# Altium PCB PCB3.PcbDoc
Units mm, origin at the board's own origin, x right, y up, seen from the top; angles counter-clockwise.
Board outline 90 x 120 mm, 2 copper layers (Top Layer, Bottom Layer); 37 components, 42 nets, 192 pads, 30 vias.
Unrouted connection lines stored in the file: 61.
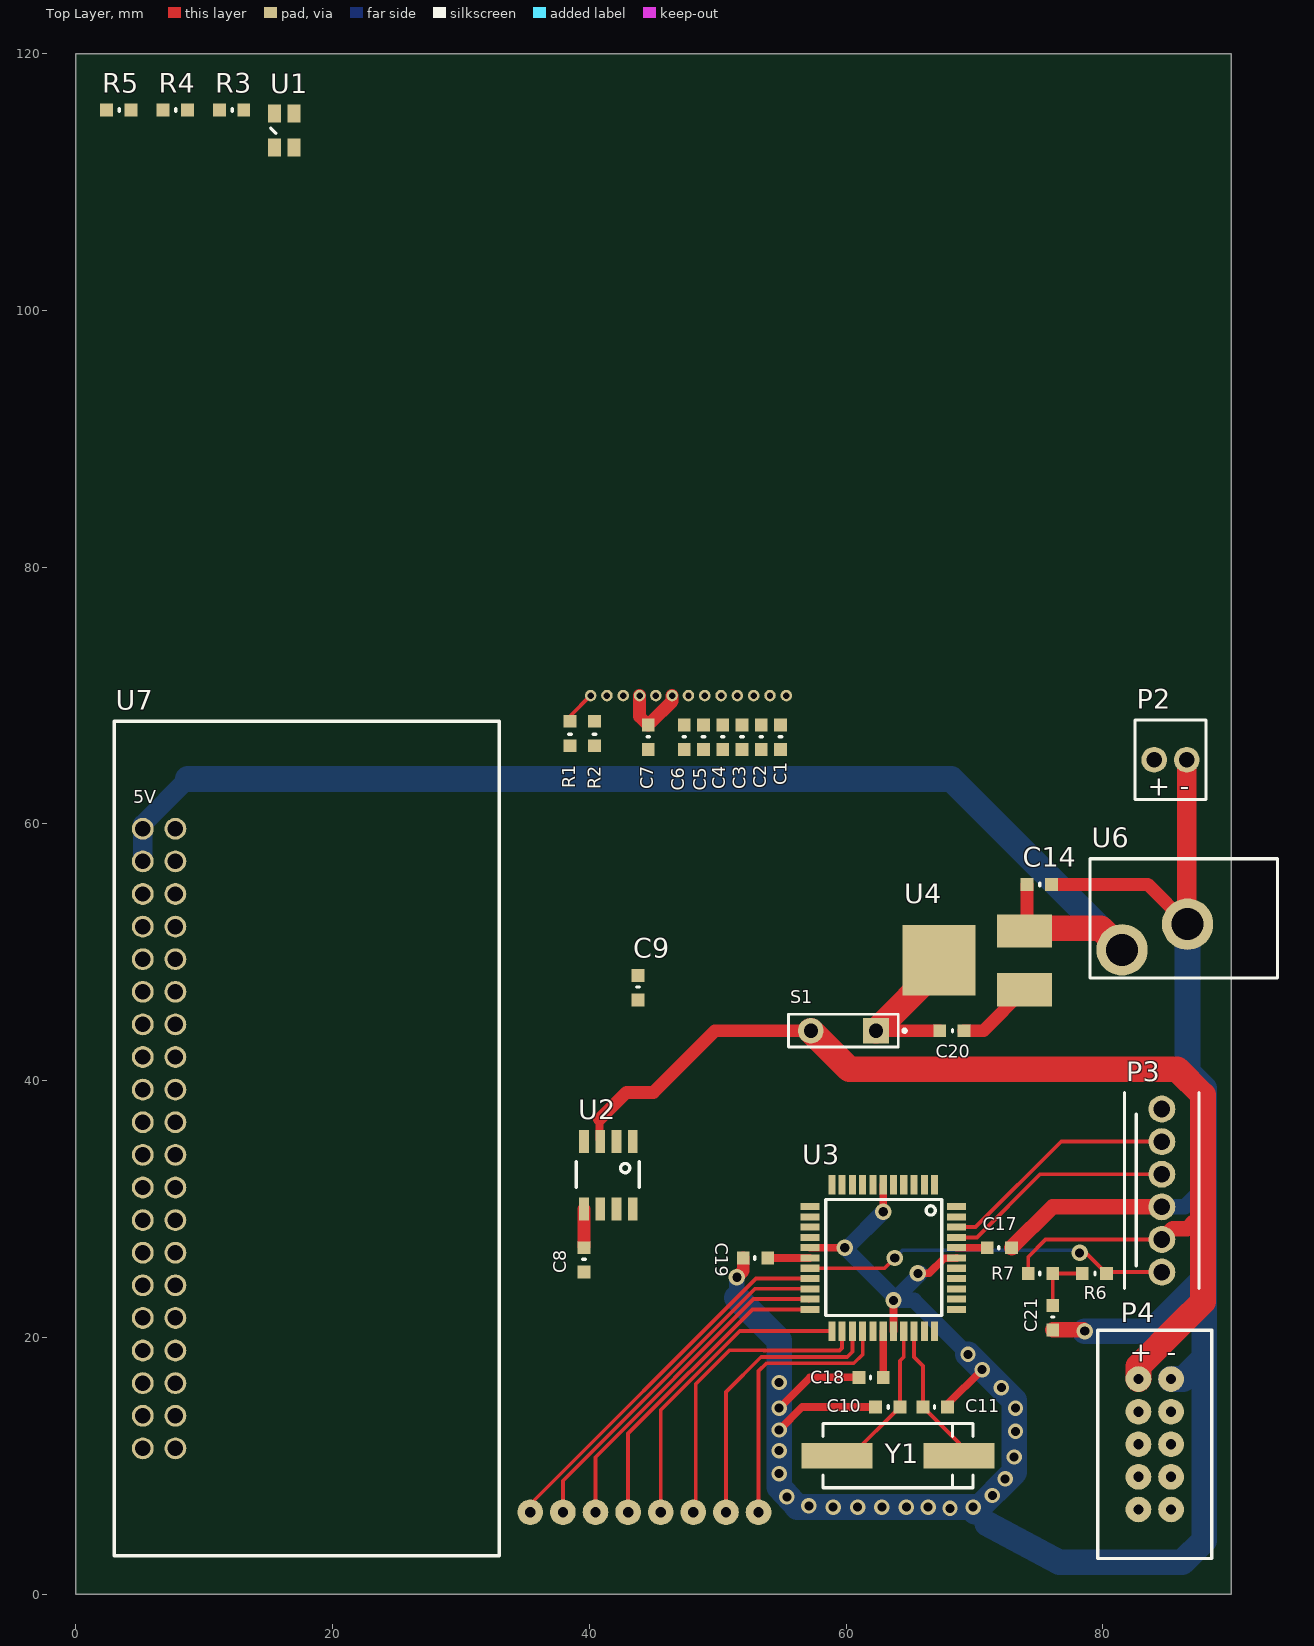
[diagram p0: Top Layer view]
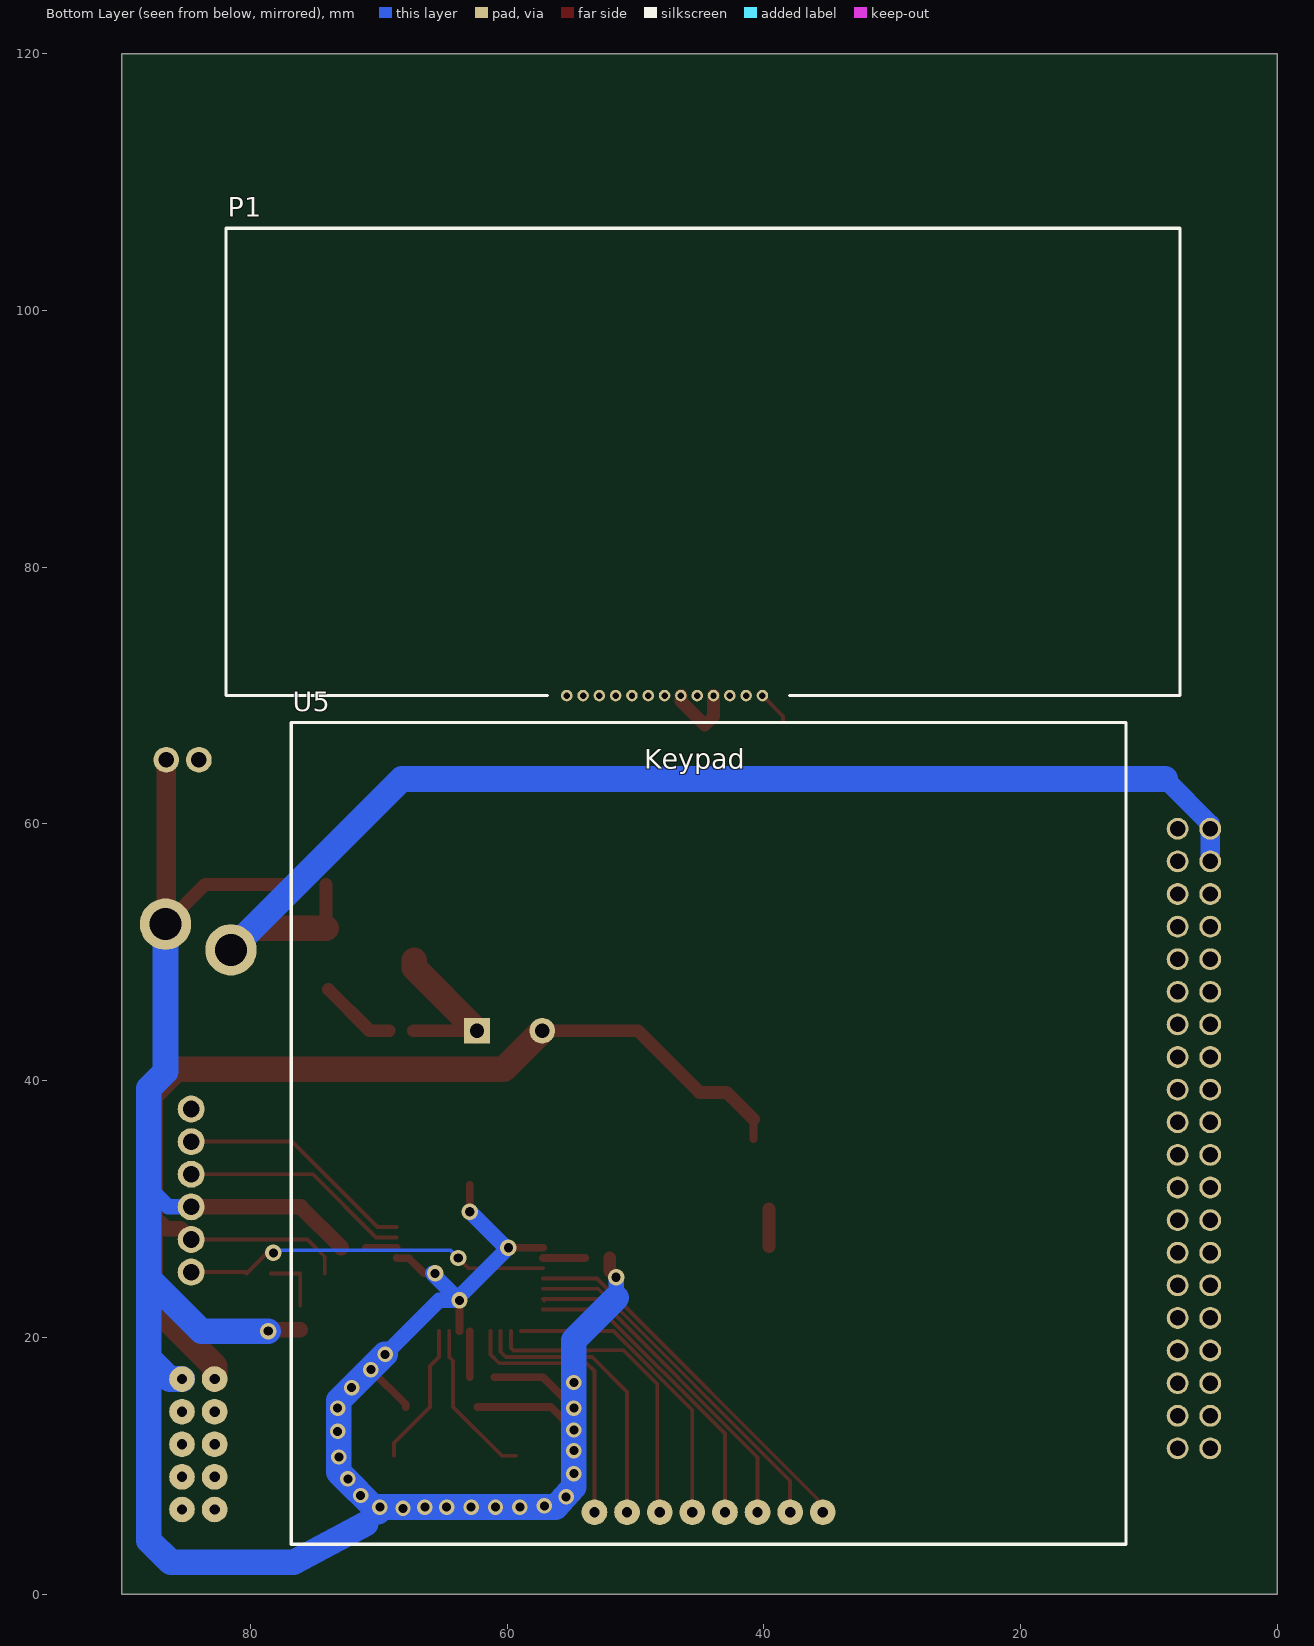
[diagram p1: Bottom Layer view, seen from below]

## Layer stack, top to bottom
Top Solder: solder mask 0.0102, Solder Resist, Dk 3.5
Top Layer: signal copper 0.0356
Dielectric 1: dielectric 0.32, FR-4, Dk 4.8
Bottom Layer: signal copper 0.0356
Bottom Solder: solder mask 0.0102, Solder Resist, Dk 3.5

## Board outline
0,0 90,0 90,120 0,120

## Design rules (kind name [scope] priority, off if disabled: settings)
Clearance [All] p1: gap=0.2
HoleSize [All] p1: absolutevalues=TRUE maxlimit=4 minlimit=0.3 maxpercent=80.000 minpercent=20.000
PolygonConnect [All] p1: connectstyle=Relief reliefconductorwidth=0.254 reliefentries=4 polygonreliefangle="90 Angle" airgapwidth=0.254
RoutingVias [All] p1: holewidth=0.711 width=1.27 viastyle="Through Hole" minholewidth=0.3 minwidth=0.7 maxholewidth=3 maxwidth=4
SilkToSilkClearance [All] p1: silktosilkclearance=0.1
SilkToSolderMaskClearance [IsPad] p1: minsilkscreentomaskgap=0.1 clearancetoexposedcopper=TRUE
SolderMaskExpansion [All] p1: expansion=0.102
UnpouredPolygon [All] p1: allowunpoured=FALSE
Width [All] p1: maxlimit=3 minlimit=0.2 preferedwidth=0.3
26 further rules are at their usual default settings.

## Classes and differential pairs
component class Clavier: U5
component class Flash: C8 U2
component class LCD: C1 C2 C3 C4 C5 C6 C7 P1 P2 R1 R2
component class Led: R3 R4 R5 U1
component class PIC: C9 C10 C11 C14 C17 C18 C19 C20 C21 P3 R6 R7 S1 U3 U4 U6 Y1
component class "Raspberry Pi": U7
component class RFID: P4

## Components (designator, comment, footprint, x,y, rotation, side; value= is the part's Value field where it differs from the comment)
C1 "Cap" 0603 54.9,65.8 r90 top
C2 "Cap" 0603 53.4,65.8 r90 top
C3 "Cap" 0603 51.9,65.8 r90 top
C4 "Cap" 0603 50.4,65.8 r90 top
C5 "Cap" 0603 48.9,65.8 r90 top
C6 "Cap" 0603 47.4,65.8 r90 top
C7 "Cap" 0603 44.6,65.8 r90 top
C8 "Cap" 0603 39.6,25.1 r90 top
C9 "Cap" 0603 43.8,46.3 r90 top
C10 "Cap" 0603 62.3,14.6 r0 top
C11 "Cap" 0603 67.9,14.6 r180 top
C14 "Cap Pol1" 0603 74.1,55.3 r0 top
C17 "Cap" 0603 72.9,27 r180 top
C18 "Cap" 0603 62.9,16.9 r180 top
C19 "Cap" 0603 53.9,26.2 r180 top
C20 "Cap Pol1" 0603 67.3,43.9 r0 top
C21 "Cap" 0603 76.1,20.6 r90 top
P1 "LCD" lcd 81.88,70 r180 bottom
P2 "lcd backlight" "lcd bk" 84,65 r0 top
P3 "ISCP" ISCP 84.6,25.1 r90 top
P4 "UEXT connector" "Conneteur UEXT" 79.6,2.8 r0 top
R1 "Res2" 0603 38.5,68 r270 top
R2 "Res2" 0603 40.4,68 r270 top
R3 "Res2" 0603 11.2,115.6 r0 top
R4 "Res2" 0603 6.8,115.6 r0 top
R5 "Res2" 0603 2.4,115.6 r0 top
R6 "Res2" 0603 78.4,25 r0 top
R7 "Res2" 0603 76.1,25 r180 top
S1 "SW-SPST" SPST-2 59.8,43.9 r180 top
U1 "ledRGB" "LED RGB" 15.5,112.7 r0 top
U2 "Flash" flash 43.4,34.7 r180 top
U3 "PIC32_1" PIC32 68.6,30.2 r270 top
U4 "regulateur" regulateur 73.9,47.1 r90 top
U5 "clavier" keypad 76.8,3.9 r180 bottom
U6 "alim" Alim 79,48 r270 top
U7 "Raspberry_pi_zero_w" RASPB 3,3 r0 top
Y1 "Quartz 8MHz" quartz 68.8,10.8 r180 top

## Footprints (in the part's own frame and the unit in brackets; to place one, negate y for a bottom-side part, rotate by r counter-clockwise, add the part's x,y. Pads: shape width x height; smd on the part's side, far side on the other; paste and mask are expansions set on the pad)
0603 [mm]
  rect 1x1 smd: 1(0,0) 2(1.9,0)
  silkscreen extent 1,-0.1 1,0.1
Alim [mm]
  round 4 hole 2.5: 1(-2.2,2.5) 2(-4.2,7.6)
  silkscreen extent -9.3,0 0,14.6
"Conneteur UEXT" [mm]
  round 2 hole 0.8: 1(3.175,13.97) 2(5.715,13.97) 3(3.175,11.43) 4(5.715,11.43) 5(3.175,8.89) 6(5.715,8.89) 7(3.175,6.35) 8(5.715,6.35) 9(3.175,3.81) 10(5.715,3.81)
  silkscreen extent 0,0 8.89,17.78
flash [mm]
  rect 0.76x1.78 smd: 1(0,-0.572) 2(1.27,-0.572) 4(3.81,-0.572) 5(0,4.68) 6(1.27,4.68) 7(2.54,4.68) 8(3.81,4.68)
  rect 0.72x1.78 smd: 3(2.54,-0.572)
  silkscreen extent -0.5,1 4.4,3
ISCP [mm]
  round 2.1 hole 1.3: GND(5.08,0) PGC(10.16,0) PGD(7.62,0) PGM(12.7,0) RST(0,0) VCC(2.54,0)
  silkscreen extent -1.27,-2.9 13.97,2.9
keypad [mm]
  round 2 hole 0.8: 1(23.61,2.5) 2(26.15,2.5) 3(28.69,2.5) 4(31.23,2.5) 5(33.77,2.5) 6(36.31,2.5) 7(38.85,2.5) 8(41.39,2.5)
  silkscreen extent 0,0 65,64
lcd [mm]
  round 0.9 hole 0.5: 1(26.53,0) 2(27.8,0) 3(29.07,0) 4(30.34,0) 5(31.61,0) 6(32.88,0) 7(34.15,0) 8(35.42,0) 9(36.69,0) 10(37.96,0) 11(39.23,0) 12(40.5,0) 13(41.77,0)
  silkscreen extent 0,0 74.3,36.4
"lcd bk" [mm]
  round 2 hole 1.2: 1(0,0) 2(2.54,0)
  silkscreen extent -1.5,-3.1 4.04,3.1
"LED RGB" [mm]
  rect 1x1.4 smd: 1(0,0) 2(0,2.64) 3(1.5,2.64) 4(1.5,0)
  silkscreen extent -0.3,1.1 0.1,1.5
PIC32 [mm]
  rect 1.5x0.55 smd: 1(-1.7,-1.7) 2(-1.7,-2.5) 3(-1.7,-3.3) 4(-1.7,-4.1) 5(-1.7,-4.9) 6(-1.7,-5.7) 7(-1.7,-6.5) 8(-1.7,-7.3) 9(-1.7,-8.1) 10(-1.7,-8.9) 11(-1.7,-9.7) 23(9.7,-9.7) 24(9.7,-8.9) 25(9.7,-8.1) 26(9.7,-7.3) 27(9.7,-6.5) 28(9.7,-5.7) 29(9.7,-4.9) 30(9.7,-4.1) 31(9.7,-3.3) 32(9.7,-2.5) 33(9.7,-1.7)
  rect 0.55x1.5 smd: 12(0,-11.4) 13(0.8,-11.4) 14(1.6,-11.4) 15(2.4,-11.4) 16(3.2,-11.4) 17(4,-11.4) 18(4.8,-11.4) 19(5.6,-11.4) 20(6.4,-11.4) 21(7.2,-11.4) 22(8,-11.4) 34(8,0) 35(7.2,0) 36(6.4,0) 37(5.6,0.013) 38(4.8,0) 39(4,0) 40(3.2,0) 41(2.4,0) 42(1.6,0) 43(0.8,0) 44(0,0)
  silkscreen extent -0.56,-10.19 8.49,-1.14
quartz [mm]
  rect 5.5x2 smd: 1(0,0) 2(9.5,0)
  silkscreen extent -1.1,-2.5 10.6,2.5
RASPB [mm]
  round 1.7 hole 1.2: 1(4.77,56.63) 2(2.23,56.63) 3(4.77,54.09) 4(2.23,54.09) 5(4.77,51.55) 6(2.23,51.55) 7(4.77,49.01) 8(2.23,49.01) 9(4.77,46.47) 10(2.23,46.47) 11(4.77,43.93) 12(2.23,43.93) 13(4.77,41.39) 14(2.23,41.39) 15(4.77,38.85) 16(2.23,38.85) 17(4.77,36.31) 18(2.23,36.31) 19(4.77,33.77) 20(2.23,33.77) 21(4.77,31.23) 22(2.23,31.23) 23(4.77,28.69) 24(2.23,28.69) 25(4.77,26.15) 26(2.23,26.15) 27(4.77,23.61) 28(2.23,23.61) 29(4.77,21.07) 30(2.23,21.07) 31(4.77,18.53) 32(2.23,18.53) 33(4.77,15.99) 34(2.23,15.99) 35(4.77,13.45) 36(2.23,13.45) 37(4.77,10.91) 38(2.23,10.91) 39(4.77,8.37) 40(2.23,8.37)
  silkscreen extent 0,0 30,65
regulateur [mm]
  rect 2.6x4.3 smd: 1(0,0) 3(4.57,0)
  rect 5.5x5.7 smd: 4(2.285,6.665)
SPST-2 [mm] "Switch; 2 Leads"
  rect 2x2 hole 1.1: 1(-2.54,0)
  round 2 hole 1.1: 2(2.54,0)
  silkscreen extent -4.89,-1.27 4.28,1.27

## Part data
C1 C2 C3 C4 C5 C6 C7 C8 C9 C10 C11 C17 C18 C19 C21: "Capacitor"
C14 C20: "Polarized Capacitor (Radial)"
P1: library part "Header 13", "LCD Connector"
P2: library part "Header 2H", "Header, 2-Pin, Right Angle"
R1 R2 R3 R4 R5 R6 R7: "Resistor"
S1: "Single-Pole, Single-Throw Switch"
Y1: library part XTAL, "Crystal Oscillator"

## Via types
v1: diameter 1.2, hole 0.7, Top Layer to Bottom Layer, 22 vias
v2: diameter 1.27, hole 0.711, Top Layer to Bottom Layer, 8 vias

## Nets (pads, with @x,y where several pads share a name; then routed paths per layer and width w, separated by ;. In a path a pad name is that pad's centre, name@x,y a point inside that pad or via, vN(x,y) a via of type N, cw(c..) or ccw(c..) an arc to the next point about the centre after c; other vN are vias at no path point)
3.3V: C7.2 C8.2 C17.2 C18.1 C19.1 P1.8 P1.10 P2.1 P3.VCC P4.1 R1.2 R2.2 R7.2 S1.2 U1.1 U2.3 U2.7 U2.8 U3.17 U3.28 U3.40 | length 111
  Top Layer w0.3: R7.2 74.2,26.3 75.54,27.64 P3.VCC
  Top Layer w0.6: U2.3@40.8,35.472 40.8,37 ; C19.1 U3.17 ; C18.1 U3.28 ; U3.40 C17.2
  Top Layer w1: C8.2@39.59,27.09 U2.8 ; 40.8,37 42.9,39.1 45,39.1 49.8,43.9 S1.2 ; P1.10 43.92,68.38 C7.2 ; C7.2@44.72,67.82 46.46,69.56 P1.8
  Top Layer w1.2: P3.VCC 85.44,28.48 86.58,28.48 87.12,29.02 ; 87.96,31 88.2,31
  Top Layer w2: S1.2 60.26,40.9 85.8,40.9 87.8,38.9 87.8,22.8 86.044,21.044 82.775,17.775 P4.1
5V: C14.1 U4.3 U6.1 U7.2 U7.4 | length 97.7
  Top Layer w1: U4.3@74.1,51.87 C14.1
  Top Layer w2: U4.3@74.1,51.87 79.83,51.87 U6.1
  Bottom Layer w1.5: U7.4 U7.2 5.23,59.989 8.741,63.5
  Bottom Layer w2: 8.741,63.5 68.2,63.5 U6.1
GND: C1.1 C2.1 C3.1 C4.1 C5.1 C6.1 C7.1 C8.1 C9.2 C10.1 C11.1 C14.2 C17.1 C18.2 C19.2 C20.2 C21.1 P1.9 P1.11 P2.2 P3.GND P4.2 U2.4 U3.6 U3.16 U3.29 U3.39 U4.1 U6.2 U7.6 U7.14 U7.20 U7.25 U7.34 U7.39 | length 231.3
  Top Layer w0.6: v1(54.8,12.8) 56.6,14.6 C10.1 ; v1(54.8,14.5) 57.2,16.9 C18.2 ; U3.16 v2(59.9,27) ; v2(62.9,29.8) U3.6 ; U3.29 v2(63.7,22.9) ; v2(65.6,25) 66.468,25 67.643,26.175 68.575,26.175 U3.39 ; C11.1 67.9,14.8 v1(70.6,17.5)
  Top Layer w1: v2(51.5,24.7) 52,25.2 C19.2 ; C20.2 70.7,43.9 U4.1 ; C14.2 83.5,55.3 U6.2@86.54,52.26
  Top Layer w1.2: C17.1 76.08,30.18 P3.GND ; C21.1 v2@78.5,20.6
  Top Layer w1.5: U6.2@86.54,52.26 P2.2
  Bottom Layer w1.2: 51.5,23.1 v2(51.5,24.7) ; v2(59.9,27) v2@63.7,23.2 ; v2@60.1,27 v2(62.9,29.8) ; v2(65.6,25) 65.8,25 v2(63.7,22.9) 65.3,22.9 v1@69.2,19 ; P3.GND 86.38,30.18 87.9,31.7
  Bottom Layer w2: 51.5,23.1 54.8,19.8 54.8,8.364 56.213,6.8 v1@69.7,6.8 ; v1(69.5,18.7) 73.1,15.1 73.1,12.4 v1(73.1,10.7) 73.1,9.5 70.05,6.45 69.9,6.6 v1(69.9,6.8) ; 71,5.5 76.6,2.5 86.2,2.5 87.9,4.2 87.9,18.4 ; v2(78.6,20.5) 83.8,20.5 87.9,24.6 ; P4.2 86.27,16.77 87.9,18.4 ; U6.2 86.6,40.7 87.9,39.4 87.9,31.7 87.9,24.6 ; 87.9,18.4 87.9,24.6
  other v1: 68.1,6.7 59,6.8 60.9,6.8 62.8,6.8 64.7,6.8 66.4,6.8 57.1,6.9 55.4,7.6 71.4,7.7 72.4,9 54.8,9.4 54.8,11.2 73.2,12.7 73.2,14.5 72.1,16.1 54.8,16.5
MCLR: P3.RST R6.2 U3.18 | length 28.7
  Top Layer w0.3: U3.18 63,25.4 v2(63.8,26.2) ; v2(78.2,26.6) 78.7,26.6 R6.2 ; R6.2@80.4,25.1 P3.RST
  Bottom Layer w0.3: v2(63.8,26.2) 64.4,26.8 78.1,26.8 78.2,26.7 v2(78.2,26.6)
NetC1_2: C1.2 P1.2
NetC2_2: C2.2 P1.3
NetC3_2: C3.2 P1.4
NetC4_2: C4.2 P1.5
NetC5_2: C5.2 P1.6
NetC6_2: C6.2 P1.7
NetC9_1: C9.1 U3.7
NetC20_1: C20.1 S1.1 U4.4 | length 12.5
  Top Layer w1: S1.1 C20.1
  Top Layer w2: S1.1 67.235,48.795 U4.4
NetC21_2: C21.2 R6.1 R7.1 | length 4.8
  Top Layer w0.3: C21.2 R7.1 R6.1
NetP1_1: P1.1 U3.2
NetP1_12: P1.12 R2.1 U3.44
NetP1_13: P1.13 R1.1 U3.1 | length 2.7
  Top Layer w0.3: R1.1 38.5,68.39 P1.13
NetP4_3: P4.3 U3.38
NetP4_4: P4.4 U3.34
NetR3_1: R3.1 U1.2
NetR3_2: R3.2 U3.15
NetR4_1: R4.1 U1.3
NetR4_2: R4.2 U3.32
NetR5_1: R5.1 U1.4
NetR5_2: R5.2 U3.33
NetU2_1: U2.1 U3.20
NetU2_2: U2.2 U3.5
NetU2_5: U2.5 U3.4
NetU2_6: U2.6 U3.14
NetU3_8: U3.8 U7.10
NetU3_9: U3.9 U7.8
NetU3_19: U3.19 U5.8 | length 29.7
  Top Layer w0.3: U5.8 35.41,7.017 52.993,24.6 U3.19
NetU3_21: U3.21 U5.7 | length 26.2
  Top Layer w0.3: 40.49,6.4 40.49,10.683 52.807,23 U3.21 U3.21@57.1,22.9
NetU3_22: U3.22 U5.6 | length 24.3
  Top Layer w0.3: 43.03,6.4 43.03,12.516 52.714,22.2 U3.22
NetU3_23: U3.23 U5.5 | length 23.8
  Top Layer w0.3: 45.57,6.4 45.57,14.349 51.721,20.5 U3.23
NetU3_24: U3.24 U5.4 | length 23.9
  Top Layer w0.3: 48.11,6.4 48.3,6.59 48.3,16.372 50.938,19.01 53.604,19.01 53.614,19 59.5,19 59.7,19.2 U3.24
NetU3_25: U3.25 U5.3 | length 22.1
  Top Layer w0.3: 50.65,6.4 50.65,15.763 53.397,18.51 53.407,18.5 60.1,18.5 60.5,18.9 U3.25
NetU3_26: U3.26 U5.2 | length 21.4
  Top Layer w0.3: 53.19,6.4 53.19,17.39 53.8,18 60.605,18 61.3,18.695 U3.26
NetU3_27: U3.27 U5.1
PGEC3: P3.PGC U3.42 | length 18.8
  Top Layer w0.3: U3.42 70.1,28.6 76.76,35.26 P3.PGC
PGED3: P3.PGD U3.41 | length 18
  Top Layer w0.3: U3.41 70.2,27.8 75.12,32.72 P3.PGD
X1: C10.2 U3.30 Y1.2 | length 12.5
  Top Layer w0.3: Y1.2 60.4,10.8 C10.2 64.2,18.2 64.5,18.5 U3.30
X2: C11.2 U3.31 Y1.1 | length 11.1
  Top Layer w0.3: U3.31 65.3,18.5 66,17.8 C11.2 68.8,11.8 Y1.1
pads on no net: P3.PGM P4.5 P4.6 P4.7 P4.8 P4.9 P4.10 U3.3 U3.10 U3.11 U3.12 U3.13 U3.35 U3.36 U3.37 U3.43 U7.1 U7.3 U7.5 U7.7 U7.9 U7.11 U7.12 U7.13 U7.15 U7.16 U7.17 U7.18 U7.19 U7.21 U7.22 U7.23 U7.24 U7.26 U7.27 U7.28 U7.29 U7.30 U7.31 U7.32 U7.33 U7.35 U7.36 U7.37 U7.38 U7.40
copper on no net: | length 27.9
  Top Layer w0.3: 37.95,6.4 37.95,8.85 52.9,23.8 57.2,23.8

## Text inside footprints (layer, text, board x,y; h text height)
P2: Top Overlay "-" at 86,62.2 h1.52; Top Overlay "+" at 83.5,62.2 h1.52
P4: Top Overlay "+" at 82.1,18.1 h1.52; Top Overlay "-" at 85,18.1 h1.52
U5: Bottom Overlay "Keypad" at 49.3,64.3 h1.52
U7: Top Overlay "5V" at 4.5,61.6 h1